# Altium PCB Room03.PcbDoc (part 1 of 2)
Units mil, origin at the board's own origin, x right, y up, seen from the top; angles counter-clockwise.
Board outline 3937.01 x 3543.31 mil, 2 copper layers (Top Layer, Bottom Layer); 93 components, 90 nets, 400 pads, 126 vias.
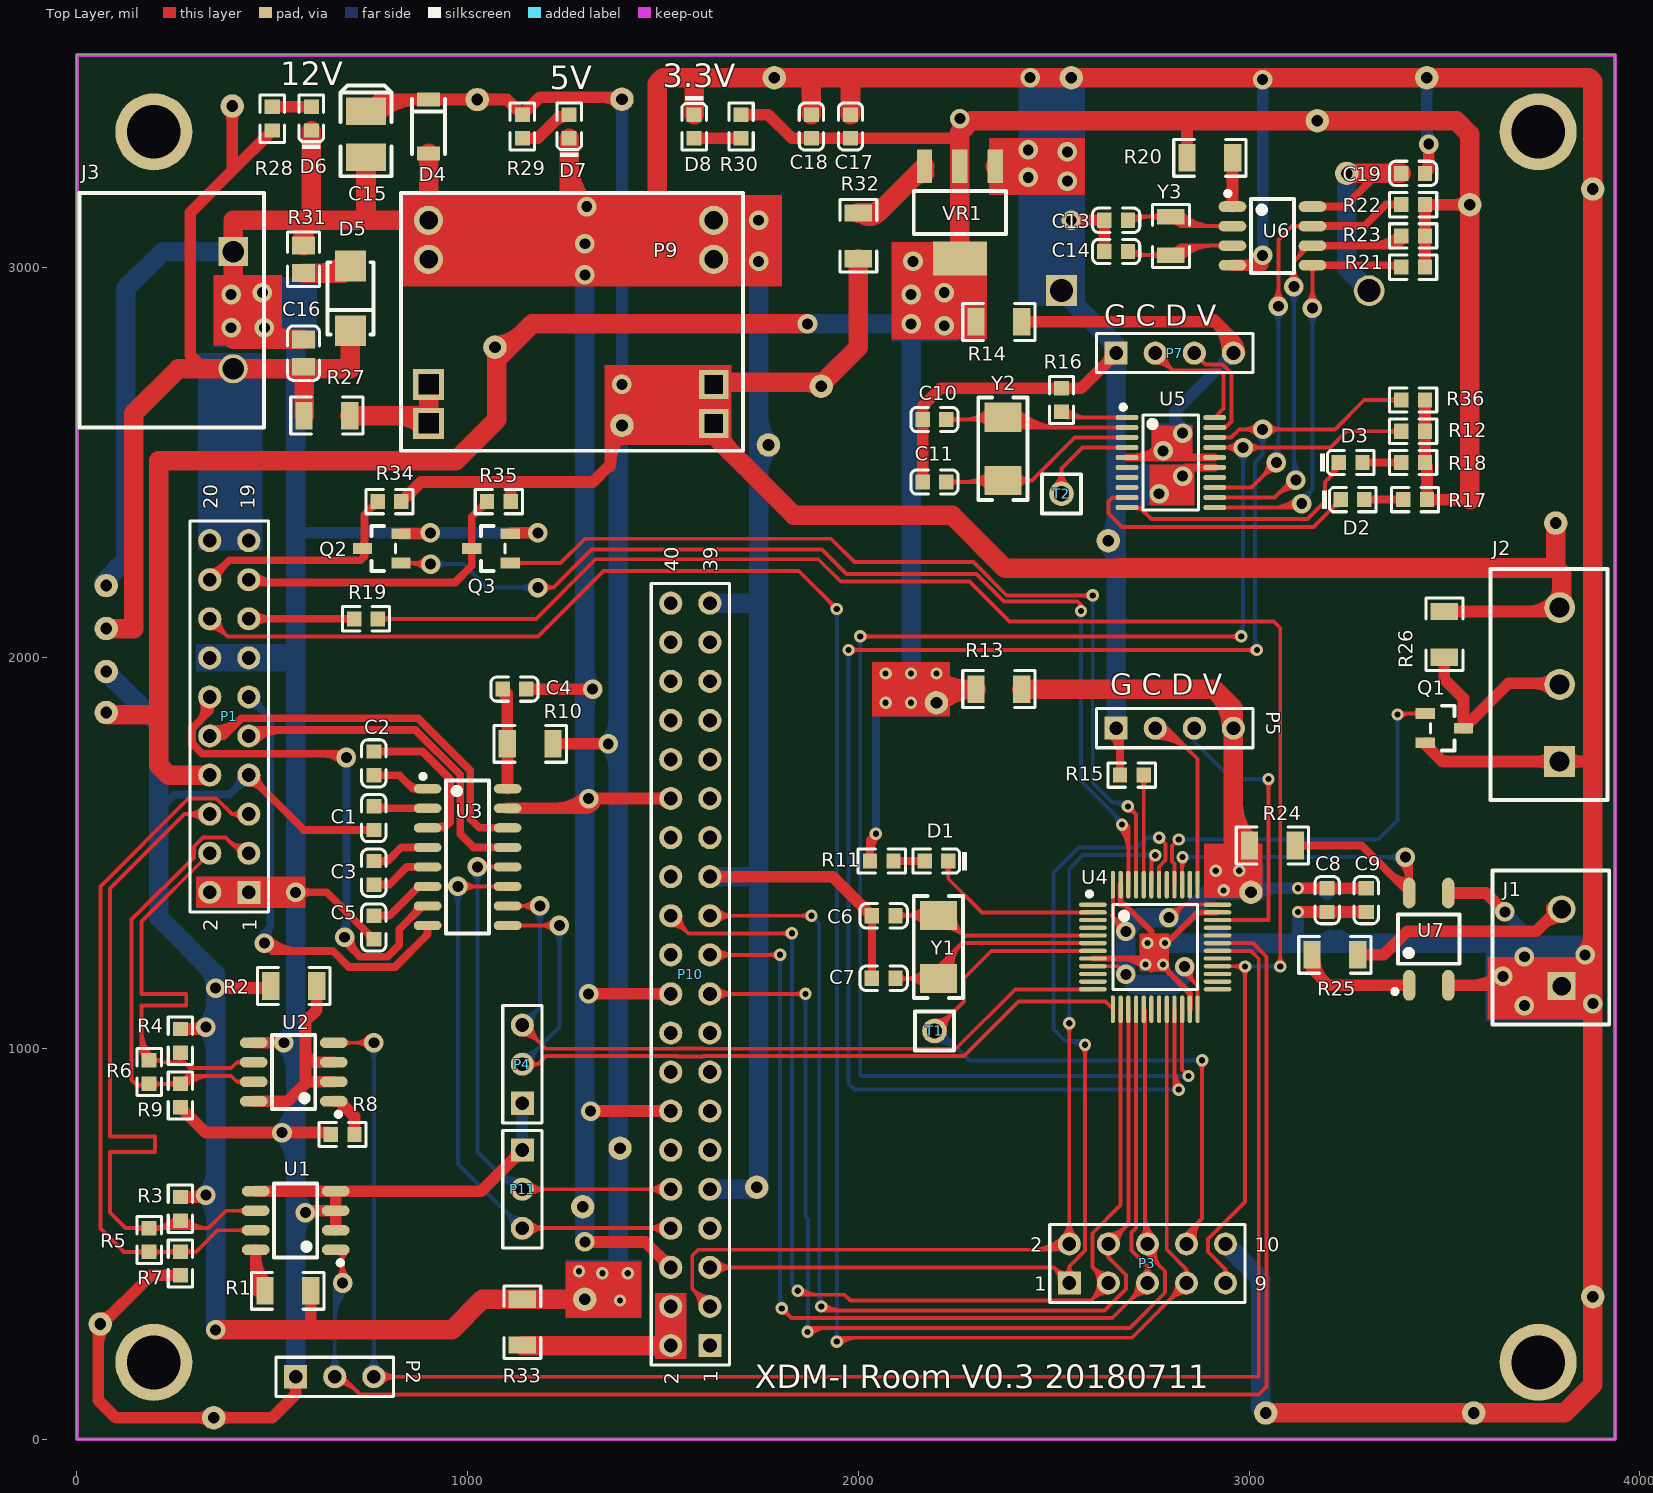
[diagram p0: Top Layer view]
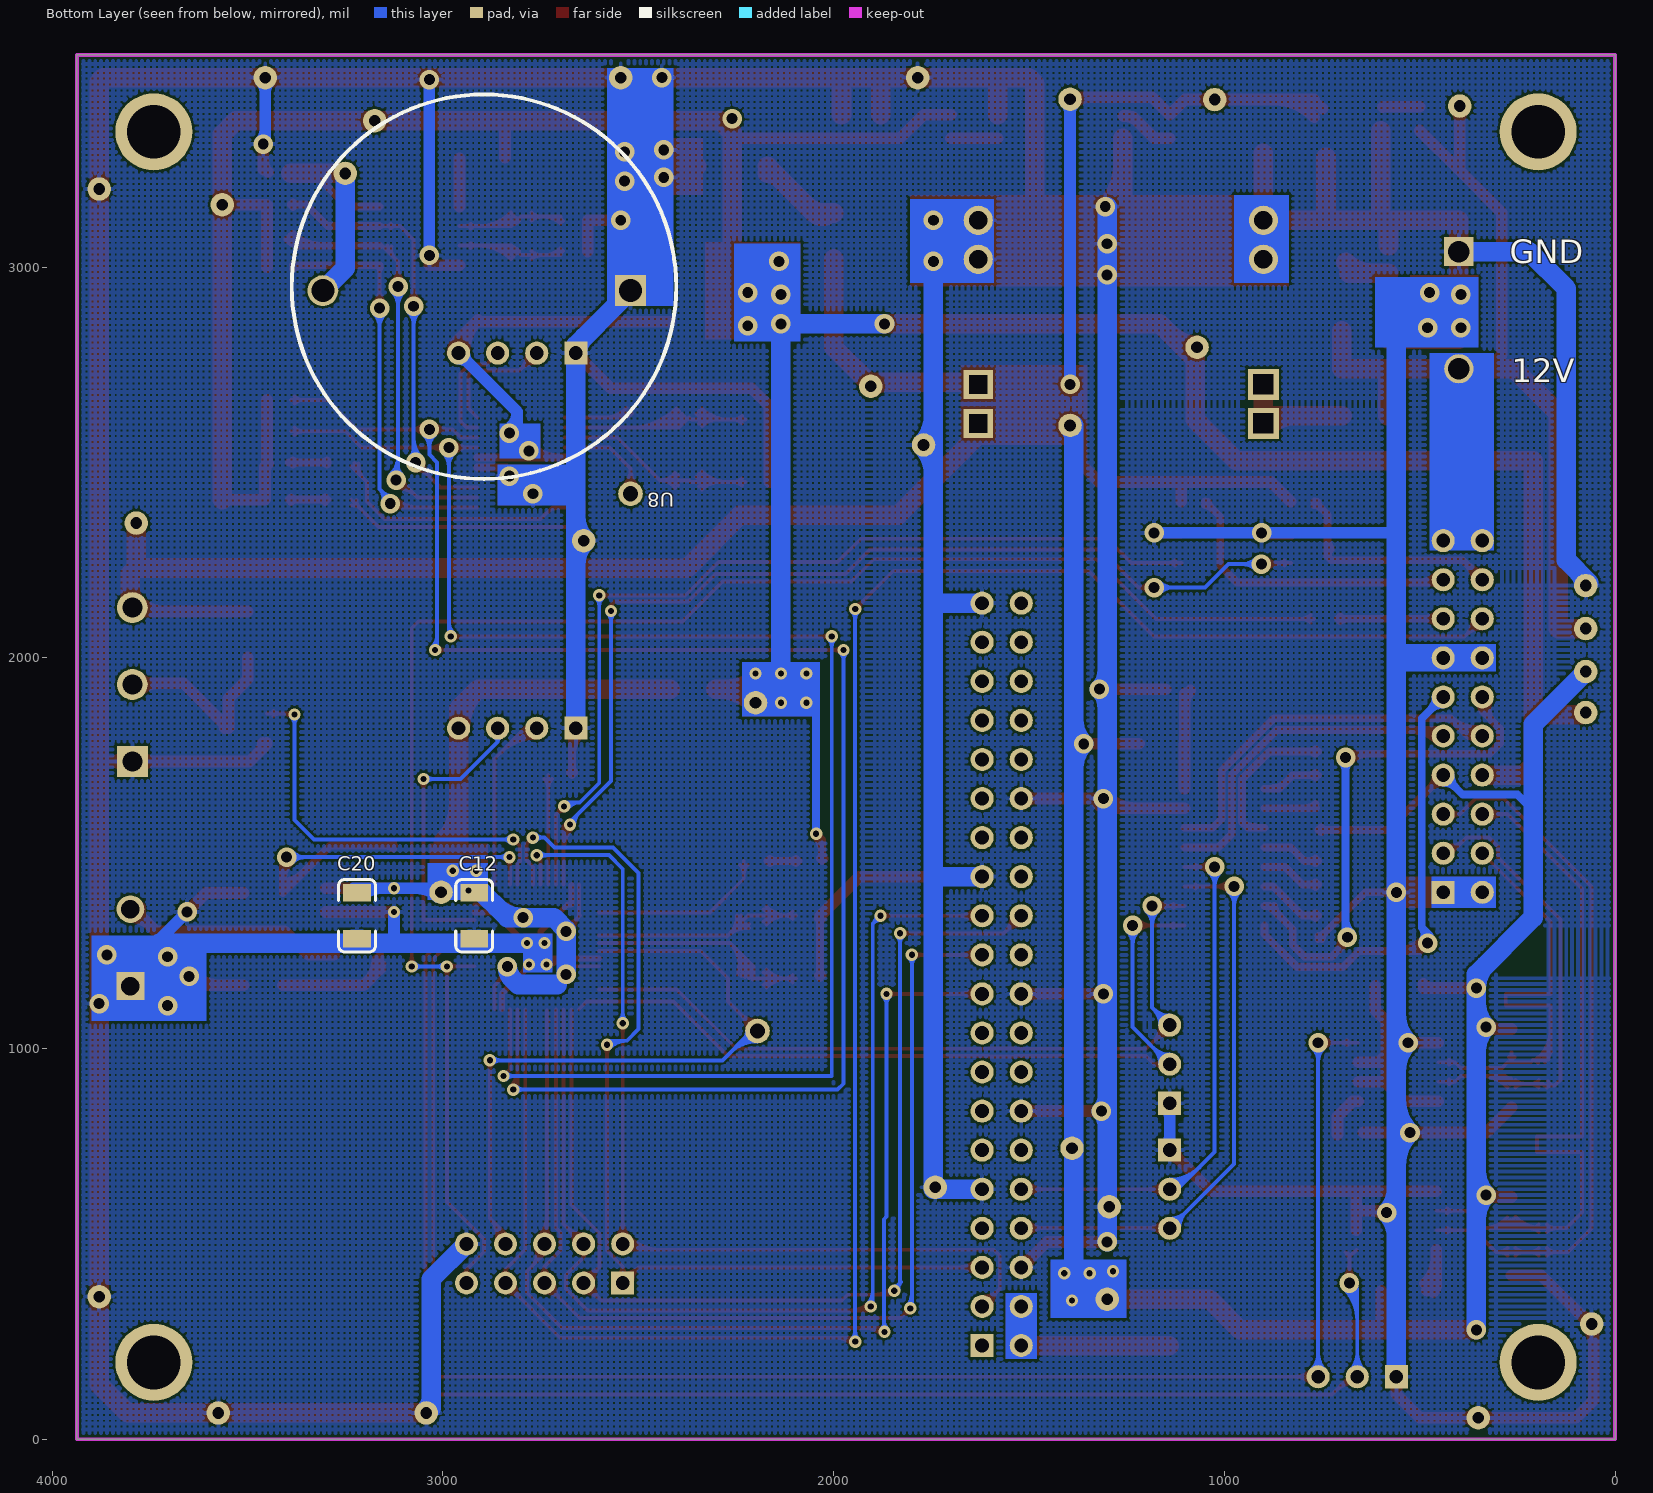
[diagram p1: Bottom Layer view, seen from below]
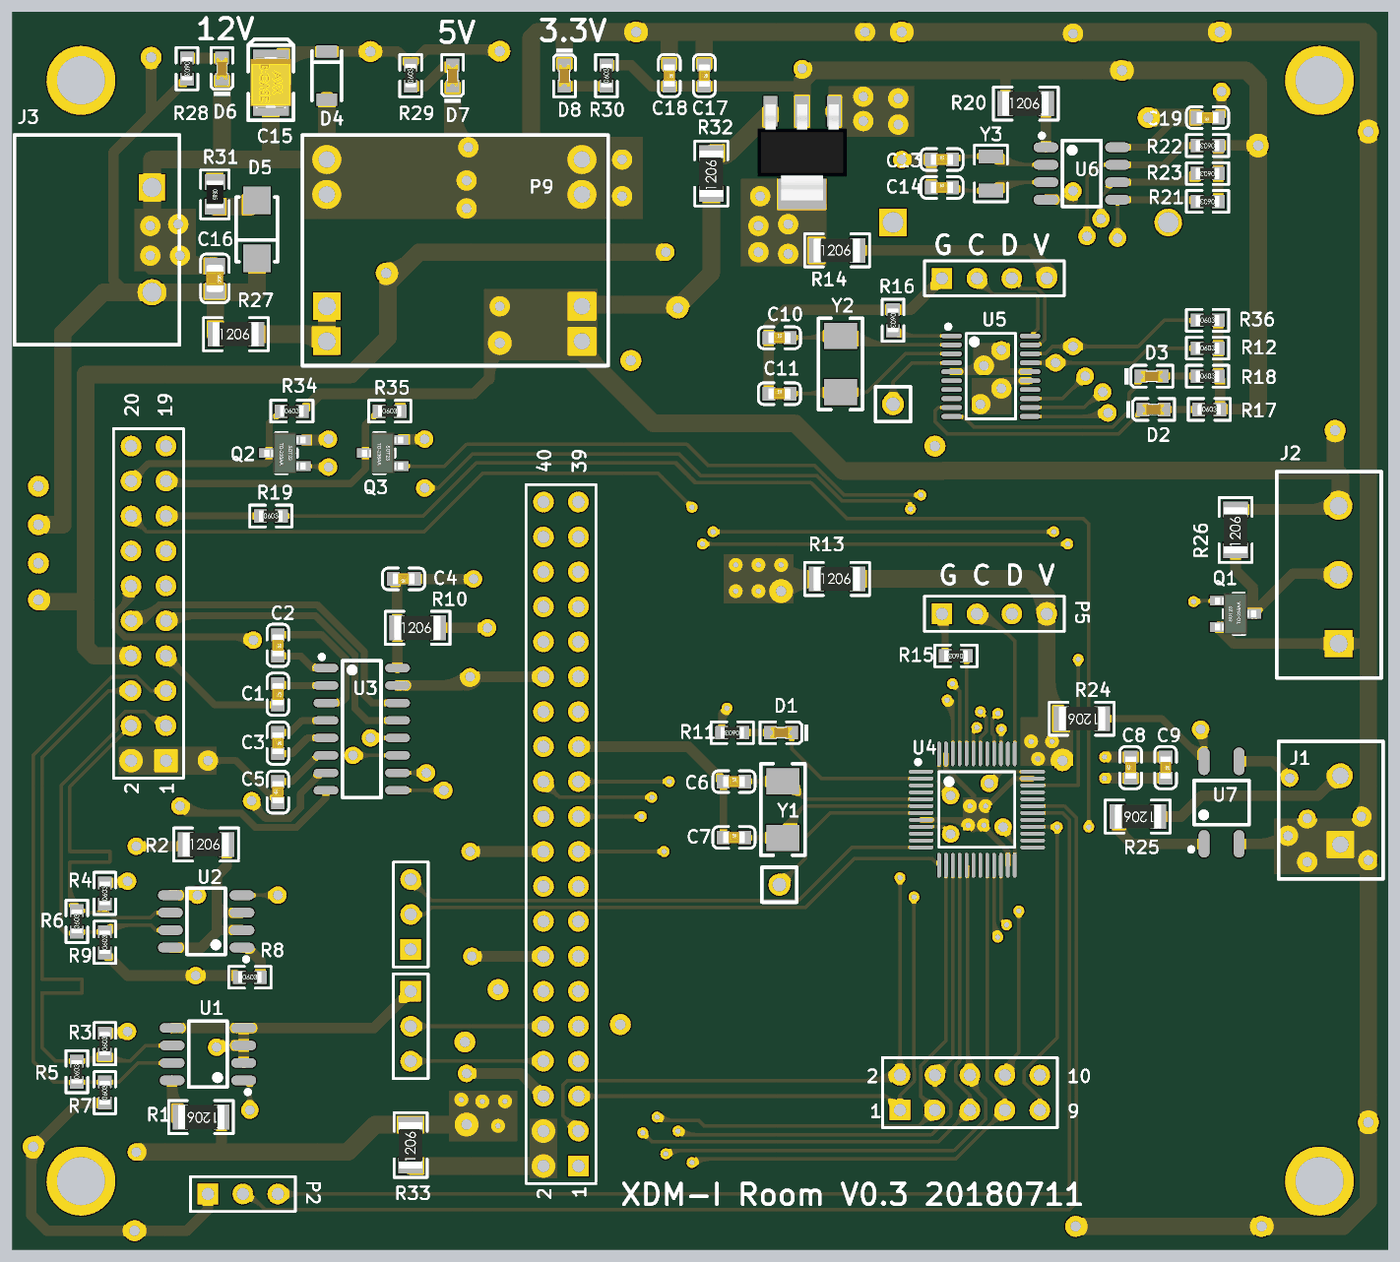
[diagram p3: 3D render of the assembled board from above, using the file's embedded part models]

## Layer stack, top to bottom
Top Layer: signal copper 1.4
Dielectric: dielectric 12.6, FR-4, Dk 4.8
Bottom Layer: signal copper 1.4

## Board outline
0,0 3937.01,0 3937.01,3543.31 0,3543.31

## Design rules (kind name [scope] priority, off if disabled: settings)
Clearance [All] p1: gap=6
DiffPairsRouting [All] p1: maxlimit=10 minlimit=10 mostfreqgap=10 maxuncoupledlength=500
Height [All] p1 off: minheight=0 maxheight=1000 prefheight=500
HoleSize [All] p1: absolutevalues=TRUE maxlimit=248.03 minlimit=1 maxpercent=80.000 minpercent=20.000
HoleToHoleClearance [All] p1: gap=6 allowstackedmicrovias=TRUE
MinimumSolderMaskSliver [All] p1: minsoldermaskwidth=3
PolygonConnect [All] p1: connectstyle=Relief reliefconductorwidth=10 reliefentries=4 polygonreliefangle="90 Angle"
RoutingVias [All] p1: holewidth=15.75 width=31.5 viastyle="Through Hole" minholewidth=11.81 minwidth=19.68 maxholewidth=28 maxwidth=50
SilkToSilkClearance [All] p1: silktosilkclearance=6
SilkscreenOverComponentPads [All] p1: minsilkscreentomaskgap=6
SolderMaskExpansion [All] p1: expansion=4
Width Width_GND [InNet('GND')] p1: maxlimit=50 minlimit=15 preferedwidth=30
Width [All] p2: maxlimit=50 minlimit=10 preferedwidth=10
21 further rules are at their usual default settings.

## Classes and differential pairs
component class commu: C1 C2 C3 C4 C5 P1 P2 Q2 Q3 R1 R2 R3 R4 R5 R6 R7 R8 R9 R10 R34 R35 U1 U2 U3
component class mcu: C6 C7 C8 C9 C10 C11 C12 C20 D1 D2 D3 P3 P4 P5 P7 R11 R12 R13 R14 R15 R16 R17 R18 R19 R36 T1 T2 U4 U5 Y1 Y2
component class other: C13 C14 J1 J2 Q1 R20 R21 R22 R23 R24 R25 R26 U6 U7 Y3
component class power: C15 C16 C17 C18 C19 D4 D5 D6 D7 D8 J3 P9 R27 R28 R29 R30 R31 R32 U8 VR1
component class raspi: P10 P11 R33
differential pair CON1: +CON1_P -CON1_N
differential pair CON2: +CON2_P -CON2_N

## Components (designator, comment, footprint, x,y, rotation, side; value= is the part's Value field where it differs from the comment)
C1 "1uF (105) 10% 50V" 0603_C 760,1590 r270 top
C2 "1uF (105) 10% 50V" 0603_C 760,1730 r270 top
C3 "1uF (105) 10% 50V" 0603_C 760,1450 r270 top
C4 "1uF (105) 10% 50V" 0603_C 1120,1920 r180 top
C5 "1uF (105) 10% 50V" 0603_C 760,1310 r90 top
C6 "20pF (200) 5% 50V" 0603_C 2065,1340 r0 top
C7 "20pF (200) 5% 50V" 0603_C 2065,1180 r0 top
C8 "100nF (104) 10% 50V" 0603_C 3200,1380 r90 top
C9 "10uF (106) 10% 10V" 0603_C 3300,1380 r270 top
C10 "20pF (200) 5% 50V" 0603_C 2195,2610 r0 top
C11 "20pF (200) 5% 50V" 0603_C 2195,2450 r0 top
C12 "100nF (104) 10% 50V" 1206_C 2920,1340 r90 bottom
C13 "12pF (120) 5% 50V" 0603_C 2660,3120 r0 top
C14 "12pF (120) 5% 50V" 0603_C 2660,3040 r0 top
C15 "100uF (107) ±10% 6.3V" CASE-B_3528 740,3340 r90 top
C16 "22uF (226) 20% 25V" 0805_C 580,2780 r270 top
C17 "10uF (106) 10% 10V" 0603_C 1980,3360 r270 top
C18 "100nF (104) 10% 50V" 0603_C 1880,3360 r270 top
C19 "10uF (106) 10% 10V" 0603_C 3420,3240 r180 top
C20 "100nF (104) 10% 50V" 1206_C 3220,1340 r90 bottom
D1 "蓝灯 0603" 0603_LED_S1 2200,1480 r180 top
D2 "蓝灯 0603" 0603_LED_S1 3265,2405 r0 top
D3 "红灯 0603" 0603_LED_S1 3260,2500 r0 top
D4 "ZMM5V6" LL-34 900,3360 r270 top
D5 "SS54" SMA(DO-214AC)_S1 700,2920 r90 top
D6 "绿灯 0603" 0603_LED_S1 600,3380 r90 top
D7 "绿灯 0603" 0603_LED_S1 1260,3360 r90 top
D8 "绿灯 0603" 0603_LED_S1 1580,3360 r270 top
J1 "KF301-2P" KF301-2P 3800,1160 r90 top
J2 "KF301-3P" KF301-3P 3795,1735 r90 top
J3 "XK7.62-2P" XK7.62-2P 400,3040 r0 top locked
P1 "Header 10X2" HDR2X10 440,1400 r90 top locked
P2 "Header 3" HDR1X3 560,160 r0 top
P3 "Header 5X2" HDR2X5 2540,400 r0 top locked
P4 "Header 3" HDR1X3 1140,860 r90 top
P5 "Header 4" HDR1X4 2660,1820 r0 top locked
P7 "Header 4" HDR1X4 2660,2780 r0 top
P9 "DC-DC5V3A" DC-DC3A 900,3120 r0 top locked
P10 "Header 20X2" HDR2X20 1620,240 r90 top locked
P11 "Header 3" HDR1X3 1140,740 r270 top
Q1 "2N7002 7002" SOT-23(SOT-23-3) 3500,1820 r180 top
Q2 "2N7002 7002" SOT-23(SOT-23-3) 780,2280 r0 top
Q3 "2N7002 7002" SOT-23(SOT-23-3) 1060,2280 r0 top
R1 "0Ω (0R0) ±1%" 1206_R 540,380 r180 top
R2 "0Ω (0R0) ±1%" 1206_R 555,1160 r0 top
R3 "10KΩ (1002) ±1%" 0603_R 265,590 r90 top
R4 "10KΩ (1002) ±1%" 0603_R 265,1020 r90 top
R5 "120Ω (1200) ±1%" 0603_R 185,510 r90 top
R6 "120Ω (1200) ±1%" 0603_R 185,940 r90 top
R7 "10KΩ (1002) ±1%" 0603_R 265,450 r90 top
R8 "10KΩ (1002) ±1%" 0603_R 680,780 r0 top
R9 "10KΩ (1002) ±1%" 0603_R 265,880 r90 top
R10 "0Ω (0R0) ±1%" 1206_R 1160,1780 r0 top
R11 "10KΩ (1002) ±1%" 0603_R 2060,1480 r180 top
R12 "100KΩ (1003) ±1%" 0603_R 3420,2580 r0 top
R13 "0Ω (0R0) ±1%" 1206_R 2360,1920 r0 top
R14 "0Ω (0R0) ±1%" 1206_R 2360,2860 r0 top
R15 "100KΩ (1003) ±1%" 0603_R 2700,1700 r180 top
R16 "100KΩ (1003) ±1%" 0603_R 2520,2660 r270 top
R17 "10KΩ (1002) ±1%" 0603_R 3425,2405 r0 top
R18 "10KΩ (1002) ±1%" 0603_R 3420,2500 r0 top
R19 "10KΩ (1002) ±1%" 0603_R 740,2100 r0 top
R20 "0Ω (0R0) ±1%" 1206_R 2900,3280 r0 top
R21 "10KΩ (1002) ±1%" 0603_R 3420,3000 r180 top
R22 "10KΩ (1002) ±1%" 0603_R 3420,3160 r180 top
R23 "10KΩ (1002) ±1%" 0603_R 3420,3080 r180 top
R24 "10KΩ (1002) ±1%" 1206_R 3060,1520 r180 top
R25 "1KΩ (1001) ±1%" 1206_R 3220,1240 r180 top
R26 "10KΩ (1002) ±1%" 1206_R 3500,2060 r90 top
R27 "0.1Ω (R100) ±1%" 1206_R 640,2620 r0 top
R28 "20KΩ (2002) ±1%" 0603_R 500,3380 r270 top
R29 "10KΩ (1002) ±1%" 0603_R 1140,3360 r90 top
R30 "10KΩ (1002) ±1%" 0603_R 1700,3360 r90 top
R31 "10KΩ (1002) ±1%" 0805_R 580,3020 r270 top
R32 "0.1Ω (R100) ±1%" 1206_R 2000,3080 r90 top
R33 "0Ω (0R0) ±1%" 1206_R 1140,300 r90 top
R34 "10KΩ (1002) ±1%" 0603_R 800,2400 r0 top
R35 "10KΩ (1002) ±1%" 0603_R 1080,2400 r0 top
R36 "100KΩ (1003) ±1%" 0603_R 3420,2660 r0 top
T1 "TP1" TP1 2195,1045 r0 top
T2 "TP1" TP1 2520,2420 r0 top
U1 "SN75176BDR" SOIC-8_150mil 560,560 r90 top
U2 "SN75176BDR" SOIC-8_150mil 555,940 r90 top
U3 "MAX232ESE" SOIC-16_150mil 1000,1490 r270 top locked
U4 "STM32F103C8T6" LQFP-48_7x7x05P 2760,1260 r270 top
U5 "STM32F030F4P6" TSSOP-20 2800,2500 r270 top
U6 "DS1302Z+T&R" SOIC-8_150mil 3060,3080 r270 top
U7 "EL357N(B)(TA)-G" SOP-4_P2.54 3460,1280 r90 top
U8 "BAT" BAT2032 2520,2940 r0 bottom locked
VR1 "AMS1117-3.3" SOT-223 2260,3140 r90 top
Y1 "8MHz ±20ppm 20pF" SMD-5032_2P 2205,1260 r270 top
Y2 "8MHz ±20ppm 20pF" SMD-5032_2P 2370,2535 r270 top
Y3 "32.768KHz ±20ppm 12.5pF" "SMD-3215_2P FC - 135" 2800,3080 r270 top

## Footprints (in the part's own frame and the unit in brackets; to place one, negate y for a bottom-side part, rotate by r counter-clockwise, add the part's x,y. Pads: shape width x height; smd on the part's side, far side on the other; paste and mask are expansions set on the pad)
0603_C [mm]
  rect 0.93x0.98 smd: 1(-0.77,0) 2(0.77,0)
  silkscreen extent -1.53,-0.79 1.54,0.79, body extent -0.8,-0.4 0.8,0.4, height 0.3
0603_LED_S1 [mm]
  rect 0.93x0.98 smd: A(0.77,0) K(-0.77,0)
  silkscreen extent -1.98,-0.79 1.54,0.79, body extent -0.8,-0.4 0.8,0.4, height 0.6
0603_R [mm]
  rect 0.93x0.98 smd: 1(-0.77,0) 2(0.77,0)
  silkscreen extent -1.53,-0.79 1.54,0.79, body extent -0.85,-0.4 0.85,0.4, height 0.56
0805_C [mm]
  rect 1.16x1.47 smd: 1(-0.89,0) 2(0.89,0)
  silkscreen extent -1.77,-1.04 1.77,1.04, body extent -1,-0.63 1,0.63, height 0.77
0805_R [mm]
  rect 1.16x1.47 smd: 1(-0.89,0) 2(0.89,0)
  silkscreen extent -1.77,-1.04 1.77,1.03, body extent -1,-0.63 1,0.63, height 0.49
1206_C [mm]
  rect 1.13x1.8 smd: 1(-1.49,0) 2(1.49,0)
  silkscreen extent -2.36,-1.2 2.35,1.2, body extent -1.6,-0.81 1.6,0.79, height 1
1206_R [mm]
  rect 1.13x1.8 smd: 1(-1.49,0) 2(1.49,0)
  silkscreen extent -2.36,-1.2 2.35,1.2, body extent -1.7,-0.86 1.65,0.87, height 0.85
BAT2032 [mm]
  rect 2x2 hole 1.5: 1(0,0)
  round 2 hole 1.5: 2(20,0)
  silkscreen extent -2.97,-12.75 22.02,12.24
CASE-B_3528 [mm]
  rect 1.8x2.6 smd: 1(1.5,0) 2(-1.5,0)
  silkscreen extent -2.73,-1.65 3.16,1.65, body extent -1.85,-1.47 1.85,1.46, height 2.03
DC-DC3A [mm] "DC-DC5V3Amodule"
  round 1.9 hole 1.2: 1(0,0) 2(0,-2.54) 7(18.542,-2.54) 8(18.542,0)
  rect 2x2 hole 1.3 square: 3(0,-10.668) 4(0,-13.208)
  rect 1.9x1.9 hole 1.2 square: 5(18.542,-13.208) 6(18.542,-10.668)
  silkscreen extent -1.78,-14.99 20.45,1.78
HDR1X3 [mm] "Connector; Header; 3 Position"
  rect 1.5x1.5 hole 0.9: 1(0,0)
  round 1.5 hole 0.9: 2(2.54,0) 3(5.08,0)
  silkscreen extent -1.27,-1.27 6.35,1.27
HDR1X4 [mm] "Connector; Header; 4 Position"
  rect 1.5x1.5 hole 0.9: 1(0,0)
  round 1.5 hole 0.9: 2(2.54,0) 3(5.08,0) 4(7.62,0)
  silkscreen extent -1.27,-1.27 8.89,1.27
HDR2X5 [mm] "Connector; Header; 5x2 Position"
  rect 1.5x1.5 hole 0.9: 1(0,0)
  round 1.5 hole 0.9: 2(0,2.54) 3(2.54,0) 4(2.54,2.54) 5(5.08,0) 6(5.08,2.54) 7(7.62,0) 8(7.62,2.54) 9(10.16,0) 10(10.16,2.54)
  silkscreen extent -1.27,-1.27 11.43,3.81
HDR2X10 [mm] "Connector; Header; 10x2 Position"
  rect 1.5x1.5 hole 0.9: 1(0,0)
  round 1.5 hole 0.9: 2(0,2.54) 3(2.54,0) 4(2.54,2.54) 5(5.08,0) 6(5.08,2.54) 7(7.62,0) 8(7.62,2.54) 9(10.16,0) 10(10.16,2.54) 11(12.7,0) 12(12.7,2.54) 13(15.24,0) 14(15.24,2.54) 15(17.78,0) 16(17.78,2.54) 17(20.32,0) 18(20.32,2.54) 19(22.86,0) 20(22.86,2.54)
  silkscreen extent -1.27,-1.27 24.13,3.81
HDR2X20 [mm] "Connector; Header; 20x2 Position"
  rect 1.5x1.5 hole 0.9: 1(0,0)
  round 1.5 hole 0.9: 2(0,2.54) 3(2.54,0) 4(2.54,2.54) 5(5.08,0) 6(5.08,2.54) 7(7.62,0) 8(7.62,2.54) 9(10.16,0) 10(10.16,2.54) 11(12.7,0) 12(12.7,2.54) 13(15.24,0) 14(15.24,2.54) 15(17.78,0) 16(17.78,2.54) 17(20.32,0) 18(20.32,2.54) 19(22.86,0) 20(22.86,2.54) 21(25.4,0) 22(25.4,2.54) 23(27.94,0) 24(27.94,2.54) 25(30.48,0) 26(30.48,2.54) 27(33.02,0) 28(33.02,2.54) 29(35.56,0) 30(35.56,2.54) 31(38.1,0) 32(38.1,2.54) 33(40.64,0) 34(40.64,2.54) 35(43.18,0) 36(43.18,2.54) 37(45.72,0) 38(45.72,2.54) 39(48.26,0) 40(48.26,2.54)
  silkscreen extent -1.27,-1.27 49.53,3.81
KF301-2P [mm]
  rect 1.8x1.8 hole 1.2: 1(0,0)
  round 1.8 hole 1.2: 2(5,0)
  silkscreen extent -2.5,-3.1 7.5,4.5
KF301-3P [mm]
  rect 2x2 hole 1.3: 1(0,0)
  round 2 hole 1.3: 2(5,0) 3(10,0)
  silkscreen extent -2.5,-3.1 12.5,4.5
LL-34 [mm]
  rect 0.9x1.5 smd: 1(1.75,0) 2(-1.75,0)
  silkscreen extent -1.8,-1.08 1.8,1.08
LQFP-48_7x7x05P [mm]
  oval 0.28x1.8 smd mask+0.051: 1(-2.75,-4.05) 2(-2.25,-4.05) 3(-1.75,-4.05) 4(-1.25,-4.05) 5(-0.75,-4.05) 6(-0.25,-4.05) 7(0.25,-4.05) 8(0.75,-4.05) 9(1.25,-4.05) 10(1.75,-4.05) 11(2.25,-4.05) 12(2.75,-4.05) 25(2.75,4.05) 26(2.25,4.05) 27(1.75,4.05) 28(1.25,4.05) 29(0.75,4.05) 30(0.25,4.05) 31(-0.25,4.05) 32(-0.75,4.05) 33(-1.25,4.05) 34(-1.75,4.05) 35(-2.25,4.05) 36(-2.75,4.05)
  oval 1.8x0.28 smd mask+0.051: 13(4.05,-2.75) 14(4.05,-2.25) 15(4.05,-1.75) 16(4.05,-1.25) 17(4.05,-0.75) 18(4.05,-0.25) 19(4.05,0.25) 20(4.05,0.75) 21(4.05,1.25) 22(4.05,1.75) 23(4.05,2.25) 24(4.05,2.75) 37(-4.05,2.75) 38(-4.05,2.25) 39(-4.05,1.75) 40(-4.05,1.25) 41(-4.05,0.75) 42(-4.05,0.25) 43(-4.05,-0.25) 44(-4.05,-0.75) 45(-4.05,-1.25) 46(-4.05,-1.75) 47(-4.05,-2.25) 48(-4.05,-2.75)
  silkscreen extent -3.6,-4.42 2.75,2.75
SMA(DO-214AC)_S1 [mm]
  rect 2x2 smd: 1(2.1,0) 2(-2.1,0)
  silkscreen extent -2.35,-1.5 2.35,1.5
"SMD-3215_2P FC - 135" [mm]
  rect 1x1.8 smd: 1(-1.25,0) 2(1.25,0)
  silkscreen extent -2.05,-1.2 2.05,1.2
SMD-5032_2P [mm]
  rect 1.9x2.4 smd: 1(-2.05,0) 2(2.05,0)
  silkscreen extent -3.32,-1.6 3.32,1.6
SOIC-8_150mil [mm]
  oval 0.7x1.8 smd: 1(-1.905,-2.6) 2(-0.635,-2.6) 3(0.635,-2.6) 4(1.905,-2.6) 5(1.905,2.6) 6(0.635,2.6) 7(-0.635,2.6) 8(-1.905,2.6)
  silkscreen extent -2.9,-3.05 2.4,1.4
SOIC-16_150mil [mm]
  oval 0.6x1.8 smd: 1(-4.445,-2.6) 2(-3.175,-2.6) 3(-1.905,-2.6) 4(-0.635,-2.6) 5(0.635,-2.6) 6(1.905,-2.6) 7(3.175,-2.6) 8(4.445,-2.6) 9(4.445,2.6) 10(3.175,2.6) 11(1.905,2.6) 12(0.635,2.6) 13(-0.635,2.6) 14(-1.905,2.6) 15(-3.175,2.6) 16(-4.445,2.6)
  silkscreen extent -5.4,-3.05 4.97,1.4
SOP-4_P2.54 [mm]
  oval 2x0.8 smd: 1(-3,1.27) 2(-3,-1.27) 3(3,-1.27) 4(3,1.27)
  silkscreen extent -3.55,-2 1.6,2.35
SOT-23(SOT-23-3) [mm]
  rect 1.25x0.7 smd: 1(1.25,-0.95) 2(1.25,0.95) 3(-1.25,0)
  silkscreen extent -0.65,-1.46 0.9,1.46, body extent -1.5,-1.5 1.5,1.5, height 1.3
SOT-223 [mm]
  rect 2.2x1 smd: 1(3,-2.3) 2(3,0) 3(3,2.3)
  rect 2.2x3.5 smd: 2(-3,0)
  silkscreen extent -1.4,-3 1.4,3, body extent -3.49,-3.24 3.49,3.24, height 1.64
TP1 [mm] "Test Point 1"
  round 1.6 hole 1: 1(0,0)
  silkscreen extent -1.27,-1.27 1.27,1.27
TSSOP-20 [mm]
  oval 0.35x1.5 smd: 1(-2.925,-2.85) 2(-2.275,-2.85) 3(-1.625,-2.85) 4(-0.975,-2.85) 5(-0.325,-2.85) 6(0.325,-2.85) 7(0.975,-2.85) 8(1.625,-2.85) 9(2.275,-2.85) 10(2.925,-2.85) 11(2.925,2.85) 12(2.275,2.85) 13(1.625,2.85) 14(0.975,2.85) 15(0.325,2.85) 16(-0.325,2.85) 17(-0.975,2.85) 18(-1.625,2.85) 19(-2.275,2.85) 20(-2.925,2.85)
  silkscreen extent -3.75,-3.25 3.1,1.8
XK7.62-2P [mm]
  rect 1.9x1.9 hole 1.4: 1(0,0)
  round 1.9 hole 1.4: 2(0,-7.62)
  silkscreen extent -10,-11.43 2,3.81

## Part data
C1 C2 C3 C4 C5: library part "0603 1uF (105) 10% 50V", "贴片电容"
C6 C7 C10 C11: library part "0603 20pF (200) 5% 50V", "贴片电容"
C8 C18: library part "0603 100nF (104) 10% 50V", "贴片电容"
C9 C17 C19: library part "0603 10uF (106) 10% 10V", "贴片电容"
C12 C20: library part "1206 100nF (104) 10% 50V", "贴片电容"
C13 C14: library part "0603 12pF (120) 5% 50V", "贴片电容"
C15: library part "3528 100uF (107) 10% 6.3V", "钽电容"
C16: library part "0805 22uF (226) 20% 25V", "贴片电容"
D1 D2: library part "0603 蓝灯", "发光二极管"
D3: library part "0603 红灯", "发光二极管"
D4: library part "LL-34 ZMM5V6", "稳压二极管"
D5: library part "SMA(DO-214AC) SS54", "二极管"
D6 D7 D8: library part "0603 绿灯", "发光二极管"
P1: "Header, 10-Pin, Dual row"
P2 P4 P11: "Header, 3-Pin"
P3: "Header, 5-Pin, Dual row"
P5 P7: "Header, 4-Pin"
P9: library part DC-DC3A
P10: "Header, 20-Pin, Dual row"
Q1 Q2 Q3: "MOS(场效应管)"
R1 R2 R10 R13 R14 R20 R33: library part "1206 0Ω (0R0) 1%", "贴片电阻"
R3 R4 R7 R8 R9 R11 R17 R18 R19 R21 R22 R23 R29 R30 R34 R35: library part "0603 10KΩ (1002) 1%", "贴片电阻"
R5 R6: library part "0603 120Ω (1200) 1%", "贴片电阻"
R12 R15 R16 R36: library part "0603 100KΩ (1003) 1%", "贴片电阻"
R24 R26: library part "1206 10KΩ (1002) 1%", "贴片电阻"
R25: library part "1206 1KΩ (1001) 1%", "贴片电阻"
R27 R32: library part "1206 0.1Ω (R100) 1%", "贴片电阻"
R28: library part "0603 20KΩ (2002) 1%", "贴片电阻"
R31: library part "0805 10KΩ (1002) 1%", "贴片电阻"
U1 U2: library part SN75176BDR_[C7063], "RS-485/RS-422"
U3: library part MAX232ESE_[C26860], "RS232"
U4 U5: "ARM"
U6: library part DS1302Z+T&R_[C8959], "实时时钟"
U7: library part EL357N(B)(TA)-G_[C6649], "贴片光耦"
U8: library part BAT2032
VR1: library part "SOT-223 AMS1117-3.3", "低压差线性稳压(LDO)"
Y1 Y2: library part "SMD-5032_2P 8MHz 20ppm 20pF", "贴片晶振"
Y3: library part "SMD-3215_2P 32.768KHz 20ppm 12.5pF", "贴片晶振"

## Free pads (board coordinates)
  round 196.85 hole 137.8: 0(196.85,196.85) 0(196.85,3346.46) 0(3740.16,196.85) 0(3740.16,3346.46)
  round 60 hole 30: 0(350,55) 0(397.66,3412.34) 0(3005,1400) 0(3042.57,67.43) 1(60,295) 1(1025,3428.9) 1(2200,1885) 1(3455,3485) 2(1395,3430) 2(3250,3240) 2(3880,3200) 3(1785,3485) 3(3785,2345) 3(3880,365) 4(1070,2795) 4(3575,67.43) 5(1905,2695) 5(3565,3160) 6(1740,645) 6(3175,3375) 7(1295,595) 7(2545,3485) 8(1390,745) 10(75,1965) 11(75,2185) 12(75,2075) 13(75,1860) 14(2640,2300) 15(1770,2545) 16(1300,358.66) 17(1395,2595)

## Via types
v1: diameter 50, hole 28, Top Layer to Bottom Layer, 76 vias
v2: diameter 31.5, hole 15.75, Top Layer to Bottom Layer, 50 vias

## Nets (pads, with @x,y where several pads share a name; then routed paths per layer and width w, separated by ;. In a path a pad name is that pad's centre, name@x,y a point inside that pad or via, vN(x,y) a via of type N, cw(c..) or ccw(c..) an arc to the next point about the centre after c; other vN are vias at no path point)
ADC2_IN0: U4.10
ADC2_IN1: U4.11
BEEP: P1.16 P3.7 U4.20 | length 5807
  Top Layer w10: P1.16@340,2075.47 cw(c340,2016.26) 381.87,2058.13 cw(c423.74,2100) P1.16@364.53,2100 ; P1.16@340,2085.47 cw(c340,2050.4) 364.8,2075.2 cw(c389.6,2100) P1.16@354.53,2100 ; P1.16@340,2100 385,2055 1180,2055 1347.5,2222.5 1847.5,2222.5 v2(1945,2125) ; v2@1934.25,2125 ccw(c1908.3,2125) 1926.65,2143.35 ccw(c1945,2161.7) v2@1945,2135.75 ; v2(1945,250) 1955,260 2700,260 P3.7@2840,400 2840,435 ; v2@1945.53,249.47 cw(c1970.95,224.05) 1970.95,260 ; v2@1952.6,242.4 cw(c1995.09,199.91) 1995.09,260 ; U4.20@2789.53,1100.55 2789.53,485.47 2840,435 ; P3.7@2815.47,400 cw(c2756.26,400) 2798.13,358.13 cw(c2840,316.26) P3.7@2840,375.47 ; P3.7@2825.47,400 cw(c2790.4,400) 2815.2,375.2 cw(c2840,350.4) P3.7@2840,385.47 ; P3.7@2831.63,423.06 ccw(c2827.29,435) 2840,435 ; P3.7@2848.37,423.06 cw(c2852.71,435) 2840,435
  Bottom Layer w10: v2@1937.4,257.6 ccw(c1919.05,275.95) 1945,275.95 ccw(c1970.95,275.95) v2@1952.6,257.6 ; v2@1937.4,2117.4 cw(c1919.05,2099.05) 1945,2099.05 cw(c1970.95,2099.05) v2@1952.6,2117.4 ; v2(1945,250) v2@1945,2120
BOOT0: R15.1 U4.44 | length 330.9
  Top Layer w10: R15.1@2720.91,1689.61 cw(c2697.81,1666.51) 2730.47,1666.51 ; U4.44@2730.47,1419.45 R15.1@2730.47,1699.84 ; 2730.47,1667.27 cw(c2762.06,1667.27) R15.1@2739.72,1689.61
C1+: C2.2 U3.1 | length 213.5
  Top Layer w20: C2.2@760,1699.68 825.32,1699.68 860,1665 U3.1@897.64,1665 ; C2.2@766.86,1693.81 cw(c781.04,1679.63) 781.04,1699.68 cw(c781.04,1719.74) C2.2@766.86,1705.56 ; 847,1678 ccw(c874.02,1705.02) U3.1@874.02,1666.81
C1-: C2.1 U3.3 | length 466.4
  Top Layer w20: C2.1@760,1760.32 884.68,1760.32 955,1690 955,1580 ; C2.1@766.86,1754.44 cw(c781.04,1740.26) 781.04,1760.32 cw(c781.04,1780.37) C2.1@766.86,1766.19 ; U3.3@897.64,1565 940,1565 955,1580 ; U3.3@921.33,1566.81 ccw(c923.08,1611.92) 955,1580
C2+: C3.1 U3.4 | length 183.5
  Top Layer w20: C3.1@760,1480.32 795.32,1480.32 830,1515 U3.4@897.64,1515 ; C3.1@766.86,1474.44 cw(c781.04,1460.26) 781.04,1480.32 cw(c781.04,1500.37) C3.1@766.86,1486.19
C2-: C3.2 U3.5 | length 187.9
  Top Layer w20: C3.2@760,1419.68 799.68,1419.68 845,1465 U3.5@897.64,1465 ; C3.2@766.86,1413.81 cw(c781.04,1399.63) 781.04,1419.68 cw(c781.04,1439.74) C3.2@766.86,1425.56
CON1_N: P1.5 R5.1 R7.2 U1.7 | length 2097.8
  Top Layer w10: R5.1@174.61,470.28 ccw(c151.89,447.56) 151.89,479.69 ccw(c151.89,511.81) R5.1@174.61,489.09 ; R5.1@195.39,470.28 cw(c218.11,447.56) 218.11,479.69 cw(c218.11,511.81) R5.1@195.39,489.09 ; 230.37,479.69 ccw(c230.37,513.96) R7.2@254.61,489.72 ; 233.41,479.69 cw(c233.41,449.71) R7.2@254.61,470.91 ; R7.2@275.39,470.91 cw(c296.59,449.71) 296.59,479.69 ; R7.2@275.39,489.72 ccw(c299.63,513.96) 299.63,479.69 ; P1.5@418.81,1587.65 ccw(c397.32,1575.12) 397.32,1600 ; P1.5@418.81,1612.35 cw(c397.32,1624.88) 397.32,1600 ; U1.7@429.78,528.79 ccw(c414.79,513.8) 414.79,535 ccw(c414.79,556.2) U1.7@429.78,541.21 ; P1.5@440,1600 397.31,1600 ; U1.7@457.64,535 360,535 304.69,479.69 R5.1@185,479.69 120.31,479.69 60,540 60,1415 285,1640 322.69,1640 323.21,1640.53 356.79,1640.53 397.31,1600
CON1_P: P1.6 R3.1 R5.2 U1.6 | length 2463.9
  Top Layer w10: R5.2@174.61,530.91 ccw(c151.89,508.19) 151.89,540.32 ccw(c151.89,572.44) R5.2@174.61,549.72 ; R5.2@185.13,540.32 ccw(c185.13,638.57) R3.1@254.61,569.09 ; R5.2@195.39,530.91 cw(c218.11,508.19) 218.11,540.32 cw(c218.11,572.44) R5.2@195.39,549.72 ; 209.27,540.32 ccw(c209.27,614.43) R3.1@261.68,562.02 ; 233.41,540.32 ccw(c233.41,590.29) R3.1@268.75,554.95 ; R3.1@245.72,542.31 ccw(c250.06,546.04) 250.06,540.32 ; R3.1@253.31,548.82 ccw(c271.8,564.67) 271.8,540.32 ; 257.55,540.32 ccw(c257.55,566.15) R3.1@275.82,547.88 ; R3.1@260.9,555.33 ccw(c293.55,583.31) 293.55,540.32 ; R3.1@268.5,561.84 ccw(c315.29,601.94) 315.29,540.32 ; R3.1@276.09,568.34 ccw(c337.03,620.57) 337.03,540.32 ; P1.6@322.66,1582.66 ccw(c280.79,1540.79) 280.79,1600 ccw(c280.79,1659.21) P1.6@322.66,1617.34 ; P1.6@329.73,1589.73 ccw(c304.93,1564.93) 304.93,1600 ccw(c304.93,1635.07) P1.6@329.73,1610.27 ; P1.6@340,1600 275,1600 85,1410 85,775 200,775 200,735 85,735 85,580 124.68,540.32 R5.2@185,540.32 337.03,540.32 ; U1.6@429.78,578.79 ccw(c414.79,563.8) 414.79,585 ccw(c414.79,606.2) U1.6@429.78,591.21 ; U1.6@457.64,585 381.72,585 337.03,540.32
CON2_N: P1.3 R6.1 R9.2 U2.7 | length 1657.5
  Top Layer w10: 163.2,905 cw(c163.2,888.87) R6.1@174.61,900.28 ; R6.1@172.1,915.6 cw(c155,924.08) 155,905 ; R6.1@180.31,905 155,905 ; R6.1@185,909.69 R9.2@264.37,909.69 ; R6.1@195.39,900.28 cw(c218.11,877.56) 218.11,909.69 cw(c218.11,941.81) R6.1@195.39,919.09 ; 230.37,909.69 ccw(c230.37,943.96) R9.2@254.61,919.72 ; 233.41,909.69 cw(c233.41,879.71) R9.2@254.61,900.91 ; R9.2@261.25,915.05 cw(c297.35,878.95) 297.35,930 ; R9.2@263.52,911.8 281.72,930 ; R9.2@266.11,923.62 ccw(c266.32,945.4) 281.71,930 ; R9.2@268.32,907.98 cw(c321.49,854.81) 321.49,930 ; R9.2@275.39,900.91 cw(c345.63,830.67) 345.63,930 ; R9.2@278.45,914.97 cw(c291.77,919.95) 281.72,930 ; 390,1531.05 ccw(c416.69,1557.74) P1.3@430.82,1522.74 ; 400.69,1520.37 ccw(c422.84,1542.52) P1.3@434.56,1513.47 ; 411.37,1509.68 ccw(c428.98,1527.29) P1.3@438.31,1504.2 ; 411.52,1509.53 cw(c401.99,1500) P1.3@415.47,1500 ; U2.7@424.73,908.84 ccw(c410,894.32) 410,915 ; U2.7@424.73,921.16 cw(c410,935.68) 410,915 ; P1.3@440,1500 421.06,1500 380.53,1540.53 323.21,1540.53 299.47,1516.79 299.47,1489.47 140,1330 140,920 155,905 ; U2.7@452.64,915 410,915 ; 281.72,930 395,930 410,915
CON2_P: P1.4 R4.1 R6.2 U2.6 | length 1455.7
  Top Layer w10: 165,1000.07 ccw(c213.77,1000.07) R6.2@179.28,965.58 ; 165,1024.21 ccw(c237.91,1024.21) R6.2@186.35,972.65 ; 165,1048.35 ccw(c262.05,1048.35) R6.2@193.43,979.72 ; R6.2@170.83,972.09 ccw(c148.77,975.07) 164.51,990.81 ccw(c181.98,1008.28) R6.2@183.3,983.6 ; R6.2@197.27,963.26 cw(c210,955.3) 210,970.32 ; R6.2@197.27,977.37 ccw(c210,985.33) 210,970.32 ; R4.1@257.69,978.57 cw(c248.76,965) 265,965 ; R4.1@265,989.69 265,965 ; R4.1@272.31,978.57 ccw(c281.24,965) 265,965 ; P1.4@340,1500 165,1325 165,1140 280,1140 280,1110 165,1110 165,990.32 R6.2@185,970.32 210,970.32 ; U2.6@424.73,958.84 ccw(c410,944.32) 410,965 ; U2.6@424.73,971.16 cw(c410,985.68) 410,965 ; U2.6@452.64,965 410,965 ; 210,970.32 215.32,965 265,965 ; 265,965 275,965 290,950 395,950 410,965
DS1302_IO: R23.2 U5.12 U6.6 | length 1687.4
  Top Layer w10: U5.12@2912.2,2410.43 3065.43,2410.43 3115,2460 v1(3120,2455) ; 3068.79,2413.79 cw(c3120,2362.57) v1@3120,2435 ; 3085.86,2430.86 cw(c3120,2396.72) v1@3120,2445 ; 3092.93,2437.93 ccw(c3075.86,2455) v1@3100,2455 ; v1@3100.86,2964.14 ccw(c3066.72,2998.28) 3115,2998.28 ccw(c3163.28,2998.28) v1@3129.14,2964.14 ; v1@3115,2940 v1(3115,2950) 3115,3014.33 3155.67,3055 U6.6@3162.36,3055 ; 3122.48,3021.81 ccw(c3097.7,3046.59) U6.6@3132.09,3053.32 ; 3135.76,3035.1 ccw(c3119.92,3050.94) U6.6@3141.91,3055.23
  Top Layer w20: U6.6@3162.36,3055 3364.68,3055 R23.2@3389.68,3080 ; 3311.65,3055 ccw(c3311.65,3157.05) R23.2@3383.81,3084.89 ; 3359.93,3055 ccw(c3359.93,3108.77) R23.2@3397.95,3070.75 ; R23.2@3373.82,3064.14 cw(c3389.68,3048.28) R23.2@3389.68,3070.71 ; R23.2@3376.2,3066.51 ccw(c3363.7,3079.02) R23.2@3381.38,3079.02
  Bottom Layer w10: v1@3100.86,2935.86 cw(c3066.72,2901.72) 3115,2901.72 cw(c3163.28,2901.72) v1@3129.14,2935.86 ; v1@3105.86,2469.14 ccw(c3083.79,2491.21) 3115,2491.21 ccw(c3156.21,2491.21) v1@3127.07,2462.07 ; 3115,2515.36 ccw(c3180.36,2515.36) v1@3134.14,2469.14 ; v1(3115,2950) 3115,2460 v1(3120,2455)
DS1302_RSTN: R21.2 U5.11 U6.5 | length 1523.5
  Top Layer w10: U5.11@2912.2,2384.84 3114.84,2384.84 3125,2395 v1(3135,2395) cw(c3110.48,2419.52) 3110.48,2384.84 ; 3062.19,2384.84 ccw(c3062.19,2467.81) v1@3120.86,2409.14 ; 3086.34,2384.84 ccw(c3086.34,2443.66) v1@3127.93,2402.07 ; 3111.24,2384.84 cw(c3111.24,2371.24) v1@3120.86,2380.86 ; v1@3148.22,2909.14 ccw(c3114.08,2943.28) 3162.36,2943.28 ccw(c3210.65,2943.28) v1@3176.5,2909.14 ; U6.5@3156.15,2998.79 cw(c3141.17,2983.8) 3162.36,2983.8 cw(c3183.56,2983.8) U6.5@3168.57,2998.79 ; v1(3162.36,2895) U6.5@3162.36,3005
  Top Layer w20: U6.5@3162.36,3005 R21.2@3384.68,3005 ; 3359.93,3005 cw(c3359.93,2971.23) R21.2@3383.81,2995.11
  Bottom Layer w10: v1(3135,2395) 3125,2395 3162.36,2432.36 ; v1@3135,2415 ccw(c3135,2439.14) 3152.07,2422.07 ; v1@3144.6,2397.79 cw(c3166.62,2404.19) 3150.41,2420.41 ; v1@3148.22,2880.86 cw(c3114.08,2846.72) 3162.36,2846.72 cw(c3210.65,2846.72) v1@3176.5,2880.86 ; v1@3154.2,2400.58 cw(c3185.14,2409.58) 3162.36,2432.36 ; v1(3162.36,2895) 3162.36,2432.36
DS1302_SCK: R22.2 U5.13 U6.7 | length 1508.9
  Top Layer w10: U5.13@2912.2,2436.02 3006.02,2436.02 v1(3070,2500) ; v1@3050,2500 cw(c3001.72,2500) 3035.86,2465.86 cw(c3070,2431.72) v1@3070,2480 ; v1@3060.86,2914.14 ccw(c3026.72,2948.28) 3075,2948.28 ccw(c3123.28,2948.28) v1@3089.14,2914.14 ; v1(3075,2900) 3075,3070 3110,3105 U6.7@3162.36,3105 ; U6.7@3134.5,3098.79 ccw(c3119.51,3083.8) 3119.51,3105 ccw(c3119.51,3126.2) U6.7@3134.5,3111.21
  Top Layer w20: U6.7@3162.36,3105 3295,3105 3350,3160 R22.2@3389.68,3160 ; R22.2@3383.81,3154.13 ccw(c3369.63,3139.94) 3369.63,3160 ccw(c3369.63,3180.06) R22.2@3383.81,3165.87
  Bottom Layer w10: v1@3055.86,2514.14 ccw(c3009.64,2560.36) 3075,2560.36 ; v1@3060.86,2885.86 cw(c3026.72,2851.72) 3075,2851.72 cw(c3123.28,2851.72) v1@3089.14,2885.86 ; v1@3062.93,2507.07 ccw(c3033.79,2536.21) 3075,2536.21 ccw(c3106.21,2536.21) v1@3084.14,2514.14 ; v1(3070,2500) 3075,2505 v1(3075,2900)
DS1302_X1: C13.2 U6.2 Y3.1 | length 690.1
  Top Layer w10: C13.2@2692.65,3118.65 cw(c2718.16,3093.14) 2718.16,3129.21 ; C13.2@2699.53,3129.21 Y3.1@2800,3129.21 2824.21,3105 U6.2@2957.64,3105 ; C13.2@2699.72,3111.57 cw(c2742.31,3068.99) 2742.31,3129.21 ; Y3.1@2773.87,3118.83 ccw(c2748.8,3093.76) 2748.8,3129.21 ccw(c2748.8,3164.67) Y3.1@2773.87,3139.6 ; Y3.1@2804.92,3118.38 ccw(c2837.23,3150.69) 2837.23,3105 ; Y3.1@2811.99,3125.45 ccw(c2861.37,3174.84) 2861.37,3105 ; Y3.1@2819.06,3132.53 ccw(c2885.51,3198.98) 2885.51,3105 ; Y3.1@2826.13,3139.6 ccw(c2909.66,3223.12) 2909.66,3105 ; U6.2@2929.78,3098.79 ccw(c2914.79,3083.8) 2914.79,3105 ccw(c2914.79,3126.2) U6.2@2929.78,3111.21
DS1302_X2: C14.2 U6.3 Y3.2 | length 690.1
  Top Layer w10: C14.2@2692.65,3041.35 ccw(c2718.16,3066.86) 2718.16,3030.79 ; C14.2@2699.53,3030.79 Y3.2@2800,3030.79 2824.21,3055 U6.3@2957.64,3055 ; C14.2@2699.72,3048.43 ccw(c2742.31,3091.01) 2742.31,3030.79 ; Y3.2@2773.87,3020.4 ccw(c2748.8,2995.33) 2748.8,3030.79 ccw(c2748.8,3066.24) Y3.2@2773.87,3041.17 ; Y3.2@2804.92,3041.62 cw(c2837.23,3009.31) 2837.23,3055 ; Y3.2@2811.99,3034.55 cw(c2861.37,2985.16) 2861.37,3055 ; Y3.2@2819.06,3027.47 cw(c2885.51,2961.02) 2885.51,3055 ; Y3.2@2826.13,3020.4 cw(c2909.66,2936.88) 2909.66,3055 ; U6.3@2929.78,3048.79 ccw(c2914.79,3033.8) 2914.79,3055 ccw(c2914.79,3076.2) U6.3@2929.78,3061.21
EX_CON1: P1.17 Q3.3 R35.1 | length 877.4
  Top Layer w20: P1.17@440,2200 447.18,2192.82 967.82,2192.82 1010.79,2235.79 1010.79,2260 1010.79,2361.1 R35.1@1049.69,2400 ; P1.17@453.81,2186.19 cw(c469.81,2170.19) 469.81,2192.82 ; P1.17@453.81,2213.81 ccw(c504.48,2264.48) 504.48,2192.82 ; R35.1@1033.82,2384.14 cw(c1049.69,2368.28) R35.1@1049.69,2390.71 ; R35.1@1036.2,2386.51 ccw(c1023.7,2399.02) R35.1@1041.38,2399.02
EX_CON2: P1.18 Q2.3 R34.1 | length 720.8
  Top Layer w20: P1.18@340,2200 390,2250 725.79,2250 735.79,2260 735.79,2366.1 R34.1@769.69,2400 ; P1.18@340,2219.53 ccw(c340,2266.67) 373.34,2233.34 ccw(c406.67,2200) P1.18@359.53,2200 ; Q2.3@728.11,2282.67 ccw(c709.59,2301.2) 735.79,2301.2 ; Q2.3@728.17,2277.28 cw(c710.98,2259.39) 735.79,2259.39 ; R34.1@753.82,2384.14 cw(c769.69,2368.28) R34.1@769.69,2390.71 ; R34.1@756.2,2386.51 ccw(c743.7,2399.02) R34.1@761.38,2399.02
GND: C4.1 C5.1 C6.1 C7.1 C8.1 C9.2 C10.1 C11.1 C12.1 C13.1 C14.1 C15.2 C16.1 C17.1 C18.1 C19.1 C20.1 D4.1 D6.K D7.K D8.K J1.1 J2.1 J3.1 P1.1 P1.2 P1.13 P1.14 P2.1 P3.10 P4.1 P5.1 P7.1 P9.1 P9.2 P9.7 P9.8 P10.6 P10.9 P10.14 P10.20 P10.25 P10.30 P10.39 P11.1 pad.0@350,55 pad.0@3042.57,67.43 pad.1@60,295 pad.1@3455,3485 pad.2@3880,3200 pad.3@1785,3485 pad.3@3880,365 pad.4@3575,67.43 pad.6@1740,645 pad.7 pad.11 pad.14 pad.15 Q1.2 Q2.2 Q3.2 R7.1 R8.1 R9.1 R15.2 R16.1 R31.1 U1.2 U1.3 U1.4 U1.5 U2.5 U3.15 U4.8 U4.23 U4.35 U4.47 U5.15 U6.4 U7.2 U7.3 U8.1 VR1.1 | length 37070.8
  Top Layer w15: U4.8@2600.55,1230.47 2745.47,1230.47 ; U4.47@2671.42,1419.45 2671.42,1368.58 2681.42,1368.58 2750,1300 ; 2677.73,1230.47 cw(c2677.73,1157.73) v2@2729.17,1209.17 ; 2713.95,1230.47 cw(c2713.95,1193.95) v2@2739.77,1219.77 ; v2@2736.21,1277.32 ccw(c2724.47,1300) 2750,1300 ; v2@2739.25,1278.21 ccw(c2738.16,1290) 2750,1290 ; v2@2740.83,1220.83 ccw(c2779.05,1259.05) v2@2779.05,1205 ; v2@2745.83,1264.17 cw(c2784.05,1225.95) v2@2784.05,1280 ; v2@2748.21,1269.25 cw(c2760,1268.16) 2760,1280 ; 2750.16,1230.47 cw(c2750.16,1230.16) 2750.38,1230.38 ; v2@2772.68,1218.79 cw(c2750,1230.53) 2750,1205 2785,1205 2848.58,1141.42 U4.23@2848.58,1100.55 ; v2@2777.14,1267.49 ccw(c2760,1262) 2760,1280 ; v2@2785,1278.25 ccw(c2785,1310.23) 2807.62,1287.62 ; v2@2788.25,1215 ccw(c2820.23,1215) 2797.62,1192.38 ; U4.35@2919.45,1348.58 2868.58,1348.58 2800,1280 2760,1280 ; 2750,1290 2750,1300 ; 2750,1290 2760,1280
  Top Layer w20: v1(560,1400) 639.68,1400 C5.1@760,1279.68 ; v1@570.61,1389.39 cw(c596.21,1363.79) 596.21,1400 cw(c596.21,1436.21) v1@570.61,1410.61 ; C5.1@744.14,1295.55 cw(c728.28,1279.68) C5.1@750.71,1279.68 ; C5.1@746.51,1293.17 ccw(c759.02,1305.67) C5.1@759.02,1287.99 ; v1@902.4,2317.4 v1(905,2320) ; C7.1@2028.81,1186.86 ccw(c2014.63,1201.04) 2034.68,1201.04 ccw(c2054.74,1201.04) C7.1@2040.56,1186.86 ; C6.1@2028.81,1333.14 cw(c2014.63,1318.96) 2034.68,1318.96 cw(c2054.74,1318.96) C6.1@2040.56,1333.14 ; C7.1@2034.68,1180 C6.1@2034.68,1340 ; P5.1@2646.19,1806.19 cw(c2589.48,1749.47) 2669.68,1749.47 ; P5.1@2660,1820 2669.68,1810.32 R15.2@2669.68,1700 ; R15.2@2663.81,1706.86 ccw(c2649.63,1721.04) 2669.68,1721.04 ccw(c2689.74,1721.04) R15.2@2675.56,1706.86 ; v2@2730.94,1219.06 ccw(c2684.91,1265.09) v2@2750,1265.09 ; v2@2735.94,1265.94 cw(c2701.98,1231.98) 2750,1231.98 ; v2@2738.65,1275.59 ccw(c2735.17,1290) 2750,1290 2750,1205 ; 2800,2450 2837.2,2487.2 U5.15@2912.2,2487.2
  Top Layer w30: 55,246.72 cw(c108.28,246.72) pad.1@70.61,284.39 ; pad.1@60,310 ccw(c60,358.28) 94.14,324.14 ; R7.1@265,419.69 189.69,419.69 55,285 55,100 100,55 500,55 560,115 P2.1@560,160 ; R9.1@265,849.69 329.69,785 v1(525,785) R8.1@644.69,785 ; pad.0@339.39,44.39 ccw(c313.79,18.79) 313.79,55 ccw(c313.79,91.21) pad.0@339.39,65.61 ; pad.0@360.61,44.39 cw(c386.21,18.79) 386.21,55 cw(c386.21,91.21) pad.0@360.61,65.61 ; U2.5@452.64,1015 v1(530,1015) ; U1.5@457.64,635 U1.4@662.36,635 ; P2.1@549.73,149.73 cw(c524.93,124.93) 560,124.93 cw(c595.07,124.93) P2.1@570.27,149.73 ; v1@590,585 U1.3@662.36,585 ; v1@592.07,572.93 cw(c621.21,543.79) 621.21,585 ; U1.2@662.36,535 U1.3@662.36,585 ; Q2.2@829.21,2317.4 v1@902.4,2317.4 ; 874.58,2317.4 ccw(c874.58,2350.42) v1@897.93,2327.07 ; U3.15@1102.36,1615 1285,1615 v1(1310,1640) P10.30@1520,1640 ; Q3.2@1111.81,2320 v1(1180,2320) ; P11.1@1125.47,740 cw(c1090.4,740) 1115.2,715.2 cw(c1140,690.4) P11.1@1140,725.47 ; P11.1@1140,740 1035,635 U1.4@662.36,635 ; C4.1@1150.32,1920 v1(1320,1920) ; 1225.5,1615 ccw(c1225.5,1724.5) v1@1302.93,1647.07 ; 1297.93,1615 ccw(c1297.93,1652.07) v1@1324.14,1625.86 ; v1(1300,505) 1455,505 P10.6@1520,440 ; v1(1310,1140) P10.20@1520,1140 ; v1(1315,840) P10.14@1520,840 ; P10.6@1505.47,440 ccw(c1470.4,440) 1495.2,464.8 ccw(c1520,489.6) P10.6@1520,454.53 ; P10.14@1509.73,829.73 ccw(c1484.93,804.93) 1484.93,840 ccw(c1484.93,875.07) P10.14@1509.73,850.27 ; P10.20@1509.73,1129.73 ccw(c1484.93,1104.93) 1484.93,1140 ccw(c1484.93,1175.07) P10.20@1509.73,1150.27 ; P10.30@1509.73,1629.73 ccw(c1484.93,1604.93) 1484.93,1640 ccw(c1484.93,1675.07) P10.30@1509.73,1650.27 ; P10.25@1620,1440 1934.68,1440 C6.1@2034.68,1340 ; P10.25@1630.27,1429.73 cw(c1655.07,1404.93) 1655.07,1440 cw(c1655.07,1475.07) P10.25@1630.27,1450.27 ; C11.1@2164.68,2450 C10.1@2164.68,2610 2164.68,2644.68 2210.31,2690.31 R16.1@2520,2690.31 2570.31,2690.31 P7.1@2660,2780 ; v1(2545,3120) C13.1@2629.69,3120 C14.1@2629.69,3040 ; P7.1@2645.47,2780 cw(c2610.4,2780) 2635.2,2755.2 cw(c2660,2730.4) P7.1@2660,2765.47 ; U6.4@2957.64,3005 3035,3005 v1(3035,3030) ; v2(3125.31,1349.68) C8.1@3200,1349.68 C9.2@3300,1349.68 ; C19.1@3447.98,3243.32 ccw(c3418.95,3272.35) 3460,3272.35 ; Q1.2@3450.79,1782.6 3450.79,1779.21 3495,1735 J2.1@3795,1735 3880,1735 ; C19.1@3460,3249.69 v1(3460,3315) ; Q1.2@3460.39,1782.6 ccw(c3491.76,1782.6) 3469.58,1760.42 ; U7.2@3510,1161.89 J1.1@3771.89,1161.89 ; U7.3@3510,1398.11 3606.89,1398.11 v1(3655,1350) ; 3570.06,1161.89 ccw(c3570.06,1264.94) v1@3642.93,1192.07 ; v1@3657.07,1192.07 ccw(c3729.94,1264.94) 3729.94,1161.89 ; 3746.11,1161.89 cw(c3746.11,1106.11) J1.1@3785.55,1145.55 ; 3755.23,1161.89 ccw(c3755.23,1204.77) J1.1@3785.55,1174.45 ; J1.1@3775,1165 3875,1165 ; J2.1@3777.77,1717.77 ccw(c3736.17,1676.17) 3736.17,1735 ccw(c3736.17,1793.83) J2.1@3777.77,1752.23 ; J2.1@3812.23,1717.77 cw(c3853.83,1676.17) 3853.83,1735 cw(c3853.83,1793.83) J2.1@3812.23,1752.23 ; J1.1@3814.45,1145.55 cw(c3861.4,1098.6) 3861.4,1165 ; J1.1@3814.45,1174.45 ccw(c3837.26,1197.26) 3837.26,1165 ; U1.3@662.36,585 U1.4@662.36,635
  Top Layer w50: v1(395,2845) ccw(c467.33,2917.33) 467.33,2815.04 ; J3.1@400,3040 400,3120 580,3120 ; J3.1@400,3040 400.04,2815.04 C16.1@580,2815.04 ; 407.67,2815.04 ccw(c407.67,2917.33) v1(480,2845) ccw(c552.33,2917.33) C16.1@552.33,2815.04 ; R31.1@580,3055.04 580,3120 ; D6.K@600,3349.69 600,3120 ; C15.2@740,3280.94 740,3120 ; P9.2@900,3020 P9.1@900,3120 ; D4.1@900,3291.1 P9.1@900,3120 ; 1260,3097.99 cw(c1318.61,3097.99) v1(1305,3155) ; 1260,3263.64 ccw(c1413.64,3263.64) v1(1305,3155) ; D7.K@1260,3329.69 1260,3120 ; 1389.5,3120 cw(c1389.5,3239.5) v1(1305,3155) ; 1460,3120 1260,3120 ; D8.K@1580,3390.31 1580,3485 ; P9.8@1630,3120 1485,3120 1485,3469.54 1500.46,3485 1580,3485 ; C18.1@1880,3390.31 1880,3480 ; C17.1@1980,3390.31 1980,3485 ; VR1.1@2367.14,3258.11 cw(c2367.14,3162.14) v1(2435,3230) cw(c2507.43,3157.57) 2507.43,3260 ; 2450.5,3260 ccw(c2450.5,3379.5) v1(2535,3295) ; 2531.57,3260 cw(c2531.57,3396.57) v1(2435,3300) cw(c2350.55,3364.17) VR1.1@2350.55,3258.11 2438.11,3258.11 2440,3260 ; v1(2535,3220) ccw(c2440.01,3127.2) 2440.01,3260 ; 2540,3260 2440,3260 ; pad.0@3042.57,67.43 pad.4@3575,67.43 3807.43,67.43 3880,140 pad.3@3880,365 v1(3880,1115) 3880,1735 pad.2@3880,3200 3880,3475 3870,3485 pad.1@3455,3485 pad.7@2545,3485 v1(2440,3485) 1980,3485 ; 3880,1191.72 ccw(c3811.72,1191.72) v1(3860,1240) ccw(c3811.72,1288.28) 3880,1288.28 ; 580,3120 600,3120 ; 600,3120 740,3120 ; 740,3120 P9.1@900,3120 ; P9.1@900,3120 1260,3120 ; 1260,3120 ccw(c1260,3166.43) v1(1305,3155) ; 1580,3485 pad.3@1785,3485 1980,3485
  Bottom Layer w30: 560,2320 v1(905,2320) v1(1180,2320) ; P11.1@1129.73,750.27 ccw(c1104.93,775.07) 1140,775.07 ccw(c1175.07,775.07) P11.1@1150.27,750.27 ; P4.1@1129.73,849.73 cw(c1104.93,824.93) 1140,824.93 cw(c1175.07,824.93) P4.1@1150.27,849.73 ; P11.1@1140,740 P4.1@1140,860 ; v1(3035,3030) v1(3035,3480) ; 3125.31,1274.68 v2(3125.31,1349.68) ; pad.1@3444.39,3474.39 cw(c3418.79,3448.79) 3455,3448.79 cw(c3491.21,3448.79) pad.1@3465.61,3474.39 ; 3455,3351.21 ccw(c3496.21,3351.21) v1@3467.07,3322.07 ; pad.1@3455,3485 3455,3320 v1(3460,3315) ; v1(3655,1350) 3775,1230 ; J1.1@3775,1165 3775,1230 ; J1.1@3808.32,1178.66 cw(c3831.21,1230) 3775,1230
  Bottom Layer w50: pad.11@67.5,2192.5 125,2250 125,2945 220,3040 J3.1@400,3040 ; pad.11@80,2185 cw(c128.28,2185) 94.14,2219.14 ; P1.14@340,2000 P1.13@440,2000 555,2000 ; P2.1@560,160 560,785 ; 560,519.64 cw(c645.36,519.64) v1(585,580) cw(c645.36,640.36) 560,640.36 ; 560,700.5 ccw(c440.5,700.5) v1(525,785) ; 560,869.5 cw(c440.5,869.5) v1(525,785) ; 560,942.57 ccw(c457.57,942.57) v1(530,1015) ccw(c457.57,1087.43) 560,1087.43 ; 560,2895 560,2320 v1(560,1400) 560,785 ; v1(1300,505) v1(1300,2980) v1(1300,3060) v1@1300,3155 ; 1300,803.79 cw(c1351.21,803.79) v1(1315,840) cw(c1351.21,876.21) 1300,876.21 ; 1300,1115.86 cw(c1334.14,1115.86) v1(1310,1140) cw(c1334.14,1164.14) 1300,1164.14 ; 1300,1615.86 cw(c1334.14,1615.86) v1(1310,1640) cw(c1334.14,1664.14) 1300,1664.14 ; 1300,1871.72 cw(c1368.28,1871.72) v1(1320,1920) cw(c1368.28,1968.28) 1300,1968.28 ; P10.9@1620,640 1745,640 1745,1440 ; P10.25@1620,1440 1745,1440 ; P10.39@1620,2140 1745,2140 ; 1745,2472.57 cw(c1842.43,2472.57) pad.15@1773.54,2541.46 ; 1745,2617.43 ccw(c1842.43,2617.43) pad.15@1773.54,2548.54 ; v1(1745,3120) v1(1745,3015) 1745,2140 ; U8.1@2509.84,2950.16 ccw(c2424.95,3035.05) 2545,3035.05 ; v1(2545,3120) 2545,2915 2660,2800 P7.1@2660,2780 P5.1@2660,1820 ; pad.14@2636.46,2296.46 cw(c2579.64,2239.64) 2660,2239.64 ; pad.14@2636.46,2303.54 ccw(c2579.64,2360.36) 2660,2360.36 ; 2638.13,2821.87 cw(c2596.26,2780) P7.1@2655.47,2780 ; v2(2785,1270) 3705,1270 3726.64,1270 ; C12.1@2886.09,1270 ccw(c2886.09,1302.06) C12.1@2908.76,1279.39 ; C12.1@2931.24,1279.39 ccw(c2953.91,1302.06) C12.1@2953.91,1270 ; P3.10@2940,500 3030,410 3030,80 pad.0@3042.57,67.43 ; 3030,109.85 ccw(c3085,109.85) pad.0@3046.11,70.96 ; C20.1@3186.09,1270 ccw(c3186.09,1302.06) C20.1@3208.76,1279.39 ; C20.1@3231.24,1279.39 ccw(c3253.91,1302.06) C20.1@3253.91,1270 ; 3620.5,1270 cw(c3620.5,1150.5) v1(3705,1235) ; v1(525,785) 560,785 ; 1745,1440 1745,2140
  other v1: 3705,1110 3650,1185 2770,2420 2830,2465 395,2930 475,2935
  other v2: 2735,1215 2780,1215 2740,1270
GR2S4: P10.22
I2C_SCL: P3.1 P10.5 U4.42 | length 3021.9
  Top Layer w10: P10.5@1620,440 2500,440 ; P10.5@1630.27,429.73 cw(c1655.07,404.93) 1655.07,440 cw(c1655.07,475.07) P10.5@1630.27,450.27 ; P10.5@1637.34,422.66 cw(c1679.21,380.79) 1679.21,440 cw(c1679.21,499.21) P10.5@1637.34,457.34 ; P3.1@2515.49,400.81 ccw(c2462.55,402.55) 2500,440 ; P3.1@2525.48,400.48 ccw(c2494.13,401.51) 2516.31,423.69 ccw(c2538.49,445.87) P3.1@2539.52,414.52 ; P3.1@2527.65,421.19 ccw(c2515.12,442.68) 2540,442.68 ; P3.1@2539.19,424.51 cw(c2537.45,477.45) 2500,440 ; P3.1@2552.35,421.19 cw(c2564.88,442.68) 2540,442.68 ; v2@2572.4,1002.4 cw(c2554.05,984.05) 2580,984.05 cw(c2605.95,984.05) v2@2587.6,1002.4 ; 2580,517.84 v2(2580,1010) ; 2580.53,517.31 2580.53,483.21 2540,442.69 ; U4.42@2769.84,1419.45 2770,1419.61 2770,1465.42 2786.75,1482.17 2786.75,1523.25 v2(2770,1540) ; 2500,440 P3.1@2540,400 2540,442.69
  Bottom Layer w10: 2529.91,1020 cw(c2529.91,959.91) v2@2572.4,1002.4 ; P3.1@2540,400 P3.1@2540,425 ; 2554.05,1020 cw(c2554.05,984.05) v2@2579.47,1009.47 ; v2(2580,1010) 2570,1020 2529.47,1020 2499.47,1050 2499.47,1449.47 2565,1515 2715,1515 2740,1540 v2(2770,1540) ; v2@2762.4,1532.4 ccw(c2744.05,1514.05) 2744.05,1540 ccw(c2744.05,1565.95) v2@2762.4,1547.6
I2C_SDA: P3.2 P10.3 U4.43 | length 2987.6
  Top Layer w10: P10.3@1595.47,340 ccw(c1536.26,340) 1578.13,381.87 ccw(c1620,423.74) P10.3@1620,364.53 ; P10.3@1605.47,340 ccw(c1570.4,340) 1595.2,364.8 ccw(c1620,389.6) P10.3@1620,354.53 ; P10.3@1620,340 1575,385 1575,470 1590,485 P3.2@2525,485 ; 2444.57,485 ccw(c2444.57,595.43) 2522.66,517.34 ccw(c2480.79,559.21) 2540,559.21 ccw(c2599.21,559.21) P3.2@2557.34,517.34 ; 2468.71,485 ccw(c2468.71,571.29) 2529.73,510.27 ccw(c2504.93,535.07) 2540,535.07 ccw(c2575.07,535.07) P3.2@2550.27,510.27 ; 2492.86,485 ccw(c2492.86,547.14) P3.2@2536.8,503.2 ; v2@2532.4,1057.4 cw(c2514.05,1039.05) 2540,1039.05 cw(c2565.95,1039.05) v2@2547.6,1057.4 ; P3.2@2539.47,499.47 P3.2@2540,500 v2(2540,1065) ; U4.43@2750.16,1419.45 v2@2750.16,1485.16
  Bottom Layer w10: v2@2532.4,1072.6 ccw(c2514.05,1090.95) 2540,1090.95 ccw(c2565.95,1090.95) v2@2547.6,1072.6 ; v2(2540,1065) 2540,1460 2575,1495 v2(2760,1495) ; v2@2752.4,1487.4 ccw(c2734.05,1469.05) 2734.05,1495 ccw(c2734.05,1520.95) v2@2752.4,1502.6
IO1_103: U4.18
IO2_103: U4.19
IO3_103: R24.1 U4.39 U7.4 | length 1390.9
  Top Layer w10: v2@2822.4,1482.4 cw(c2806.71,1466.71) 2828.9,1466.71 ; U4.39@2828.9,1419.45 2828.9,1488.9 v2(2830,1490) ; 2828.9,1461.39 cw(c2858.61,1461.39) v2@2837.6,1482.4
  Top Layer w20: R24.1@3125,1520 3288.11,1520 U7.4@3410,1398.11 v1@3410,1480 ; R24.1@3127.32,1511.34 cw(c3148.22,1490.44) 3148.22,1520 cw(c3148.22,1549.56) R24.1@3127.32,1528.66 ; 3359.86,1448.25 ccw(c3410,1498.39) U7.4@3410,1427.48 ; v1@3389.39,1479.39 cw(c3339.64,1429.64) U7.4@3410,1429.64 ; 3394,1414.11 ccw(c3410,1430.1) U7.4@3410,1407.48
  Bottom Layer w10: v2(2830,1490) v1(3400,1490) ; v2@2837.6,1482.4 cw(c2855.95,1464.05) 2855.95,1490 cw(c2855.95,1515.95) v2@2837.6,1497.6 ; v1@3385.86,1475.86 ccw(c3351.72,1441.72) 3351.72,1490 ccw(c3351.72,1538.28) v1@3385.86,1504.14
IO4: J2.2 Q1.3 R26.1 | length 607.1
  Top Layer w30: R26.1@3500,2001.34 3500,1945 3549.21,1895.79 Q1.3@3549.21,1820 3664.21,1935 3791.85,1935 J2.2@3795,1931.85 ; Q1.3@3558.82,1820 cw(c3582.01,1820) 3565.61,1836.4 ; 3728.56,1935 cw(c3728.56,1865.41) J2.2@3777.77,1914.62 ; 3743.77,1935 ccw(c3743.77,1983.08) J2.2@3777.77,1949.08
IO4_103: Q1.1 U4.40 | length 1199.6
  Top Layer w10: U4.40@2809.21,1419.45 2809.21,1472.96 2803.25,1478.92 2803.25,1518.25 v2(2820,1535) ; v2@3382.4,1857.4 Q1.1@3450.79,1857.4 ; v2@3387.6,1847.4 cw(c3411.75,1823.25) 3411.75,1857.4 ; v2@3387.6,1862.6 ccw(c3400.15,1875.15) 3400.15,1857.4 ; Q1.1@3433.75,1851.19 ccw(c3418.77,1836.21) 3418.77,1857.4 ccw(c3418.77,1878.6) Q1.1@3433.75,1863.61
  Bottom Layer w10: v2(2820,1535) 3330,1535 3380,1585 v2(3380,1855) ; v2@2827.6,1527.4 cw(c2845.95,1509.05) 2845.95,1535 cw(c2845.95,1560.95) v2@2827.6,1542.6 ; v2@3372.4,1847.4 cw(c3354.05,1829.05) 3380,1829.05 cw(c3405.95,1829.05) v2@3387.6,1847.4
IO5_103: U4.41
LED3_030: D2.K U5.9 | length 770.8
  Top Layer w10: U5.9@2687.8,2410.43 2650.43,2410.43 2640,2400 2640,2370 2675,2335 3164.69,2335 D2.K@3234.69,2405 ; 3210.29,2380.6 cw(c3234.69,2356.21) D2.K@3234.69,2390.71 ; 3212.66,2382.98 ccw(c3191.63,2404.02) D2.K@3221.38,2404.02
LED4_030: D3.K U5.10 | length 755
  Top Layer w10: U5.10@2687.8,2384.84 2720.16,2384.84 2750,2355 3150,2355 3195,2400 3195,2450.31 D3.K@3234.69,2490 ; U5.10@2710.43,2382.95 cw(c2710.43,2354.91) 2730.26,2374.74 ; U5.10@2711.08,2383.07 cw(c2715.63,2370.59) 2725.02,2379.98 ; 3202.01,2457.32 ccw(c3166.57,2492.76) D3.K@3216.44,2497.7 ; 3216.95,2472.26 ccw(c3193.76,2495.45) D3.K@3226.39,2498.69
LED_103: D1.K U4.2 | length 501.7
  Top Layer w10: D1.K@2220.91,1469.61 cw(c2198.19,1446.89) 2230.31,1446.89 cw(c2262.44,1446.89) D1.K@2239.72,1469.61 ; D1.K@2230.31,1480 2230.31,1434.69 2316.42,1348.58 U4.2@2600.55,1348.58
LED_ST: P1.15 R19.1 | length 375.2
  Top Layer w20: P1.15@440,2100 R19.1@709.69,2100 ; P1.15@453.81,2086.19 cw(c487.14,2052.86) 487.14,2100 cw(c487.14,2147.14) P1.15@453.81,2113.81 ; R19.1@703.81,2094.13 ccw(c689.63,2079.94) 689.63,2100 ccw(c689.63,2120.06) R19.1@703.81,2105.87